# EAGLE board Qwiic_Alphanumeric_Display-Panel (EAGLE 9.6.2), part 1 of 3
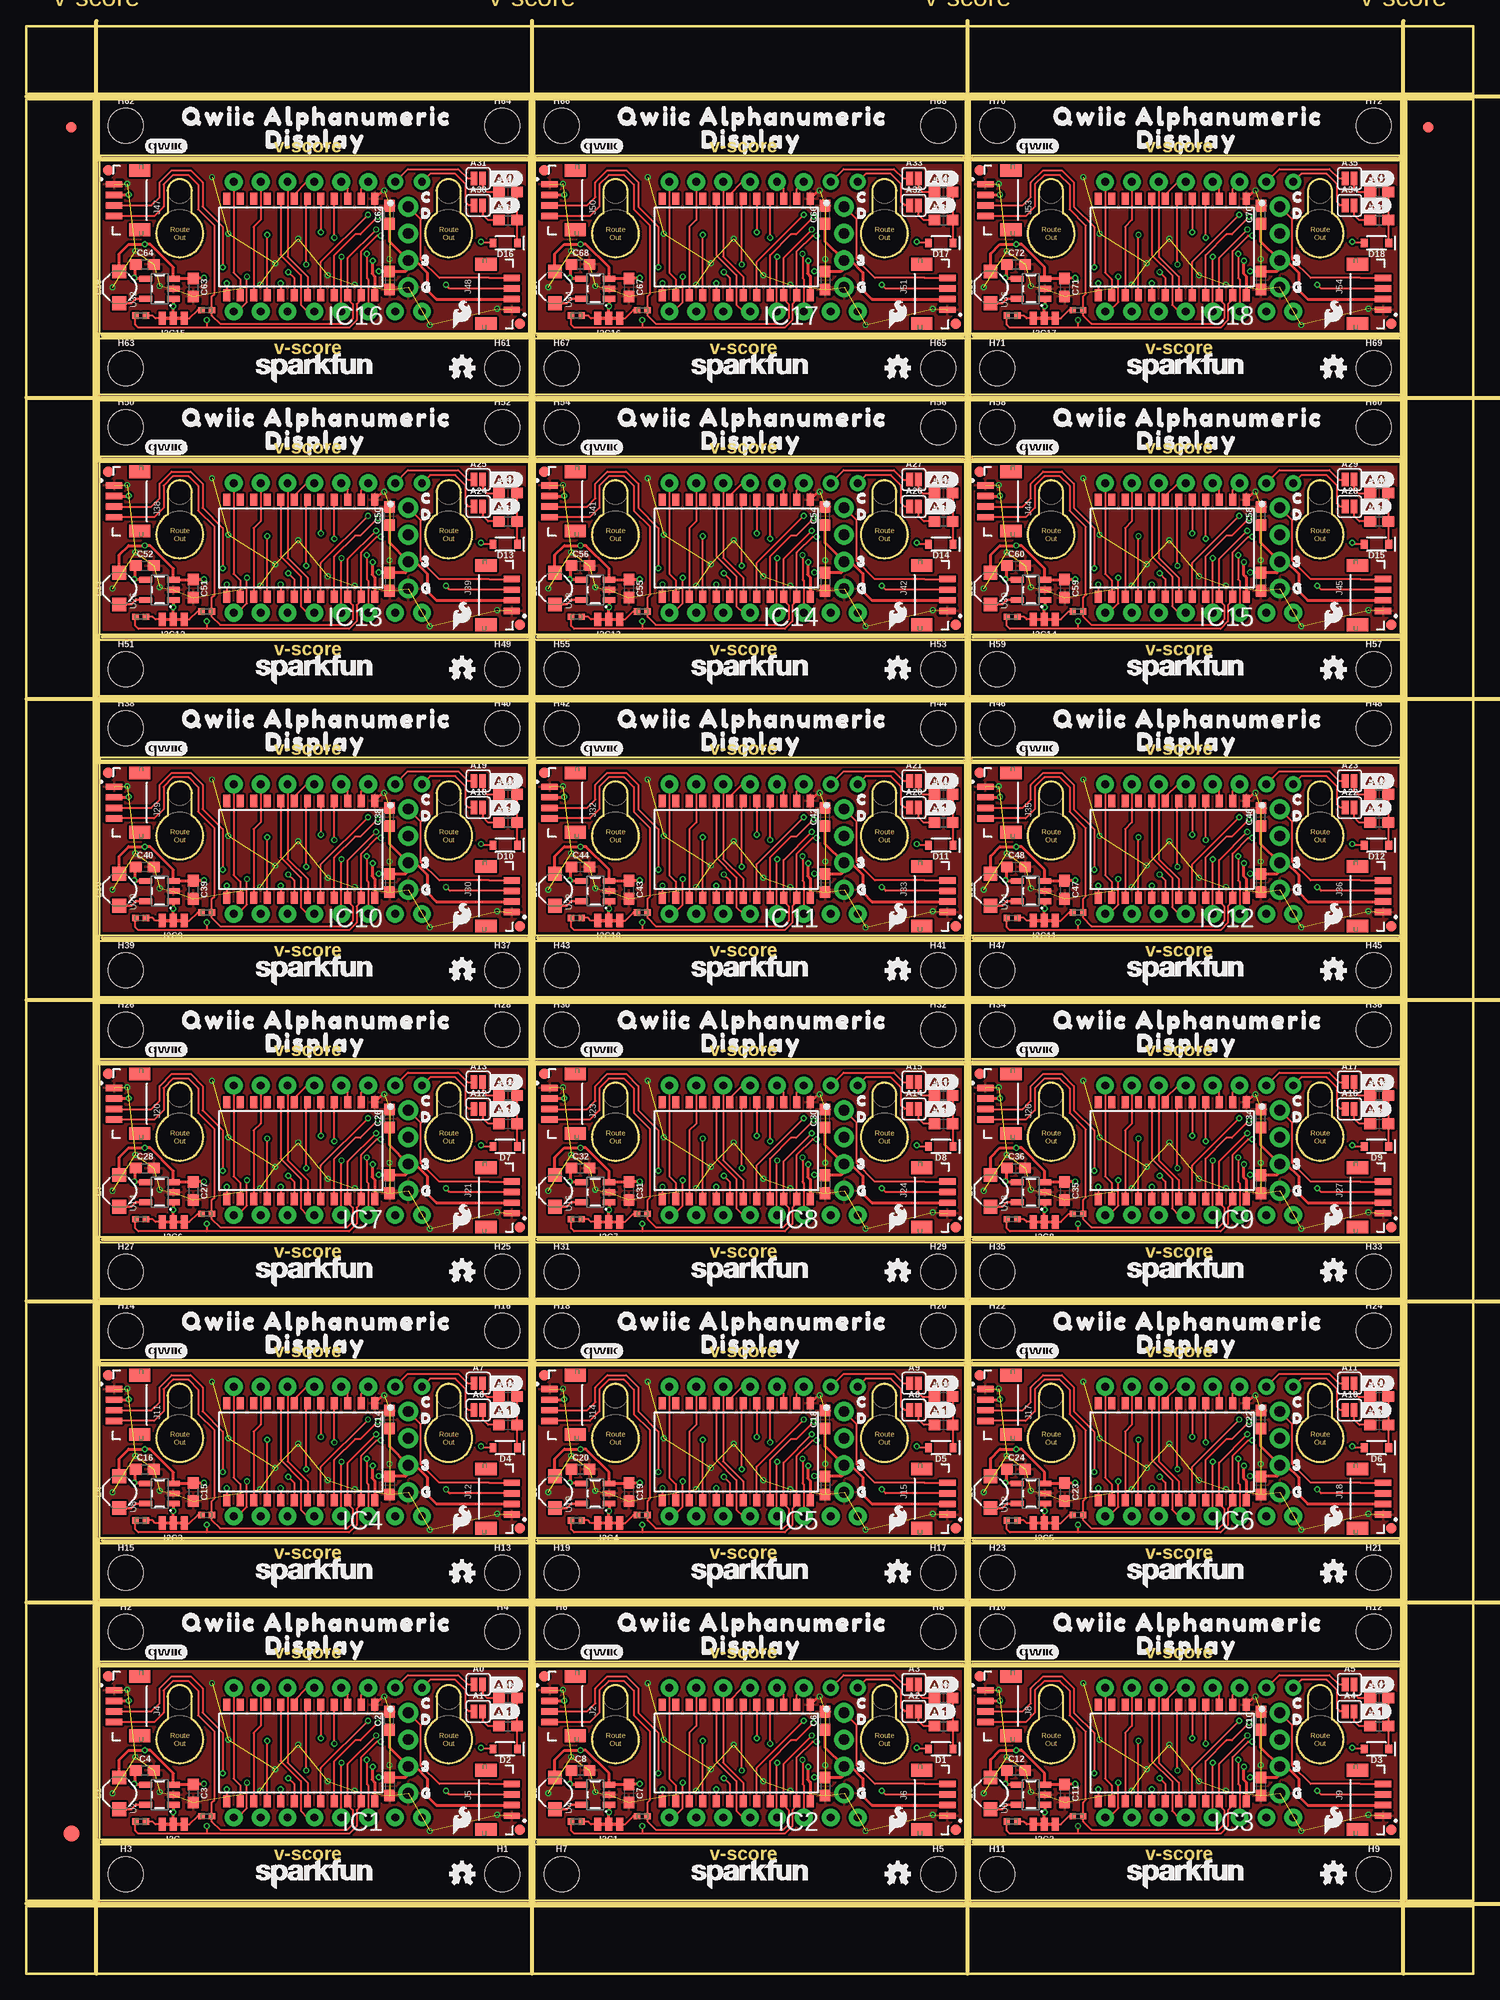
[diagram p0: board, top side]
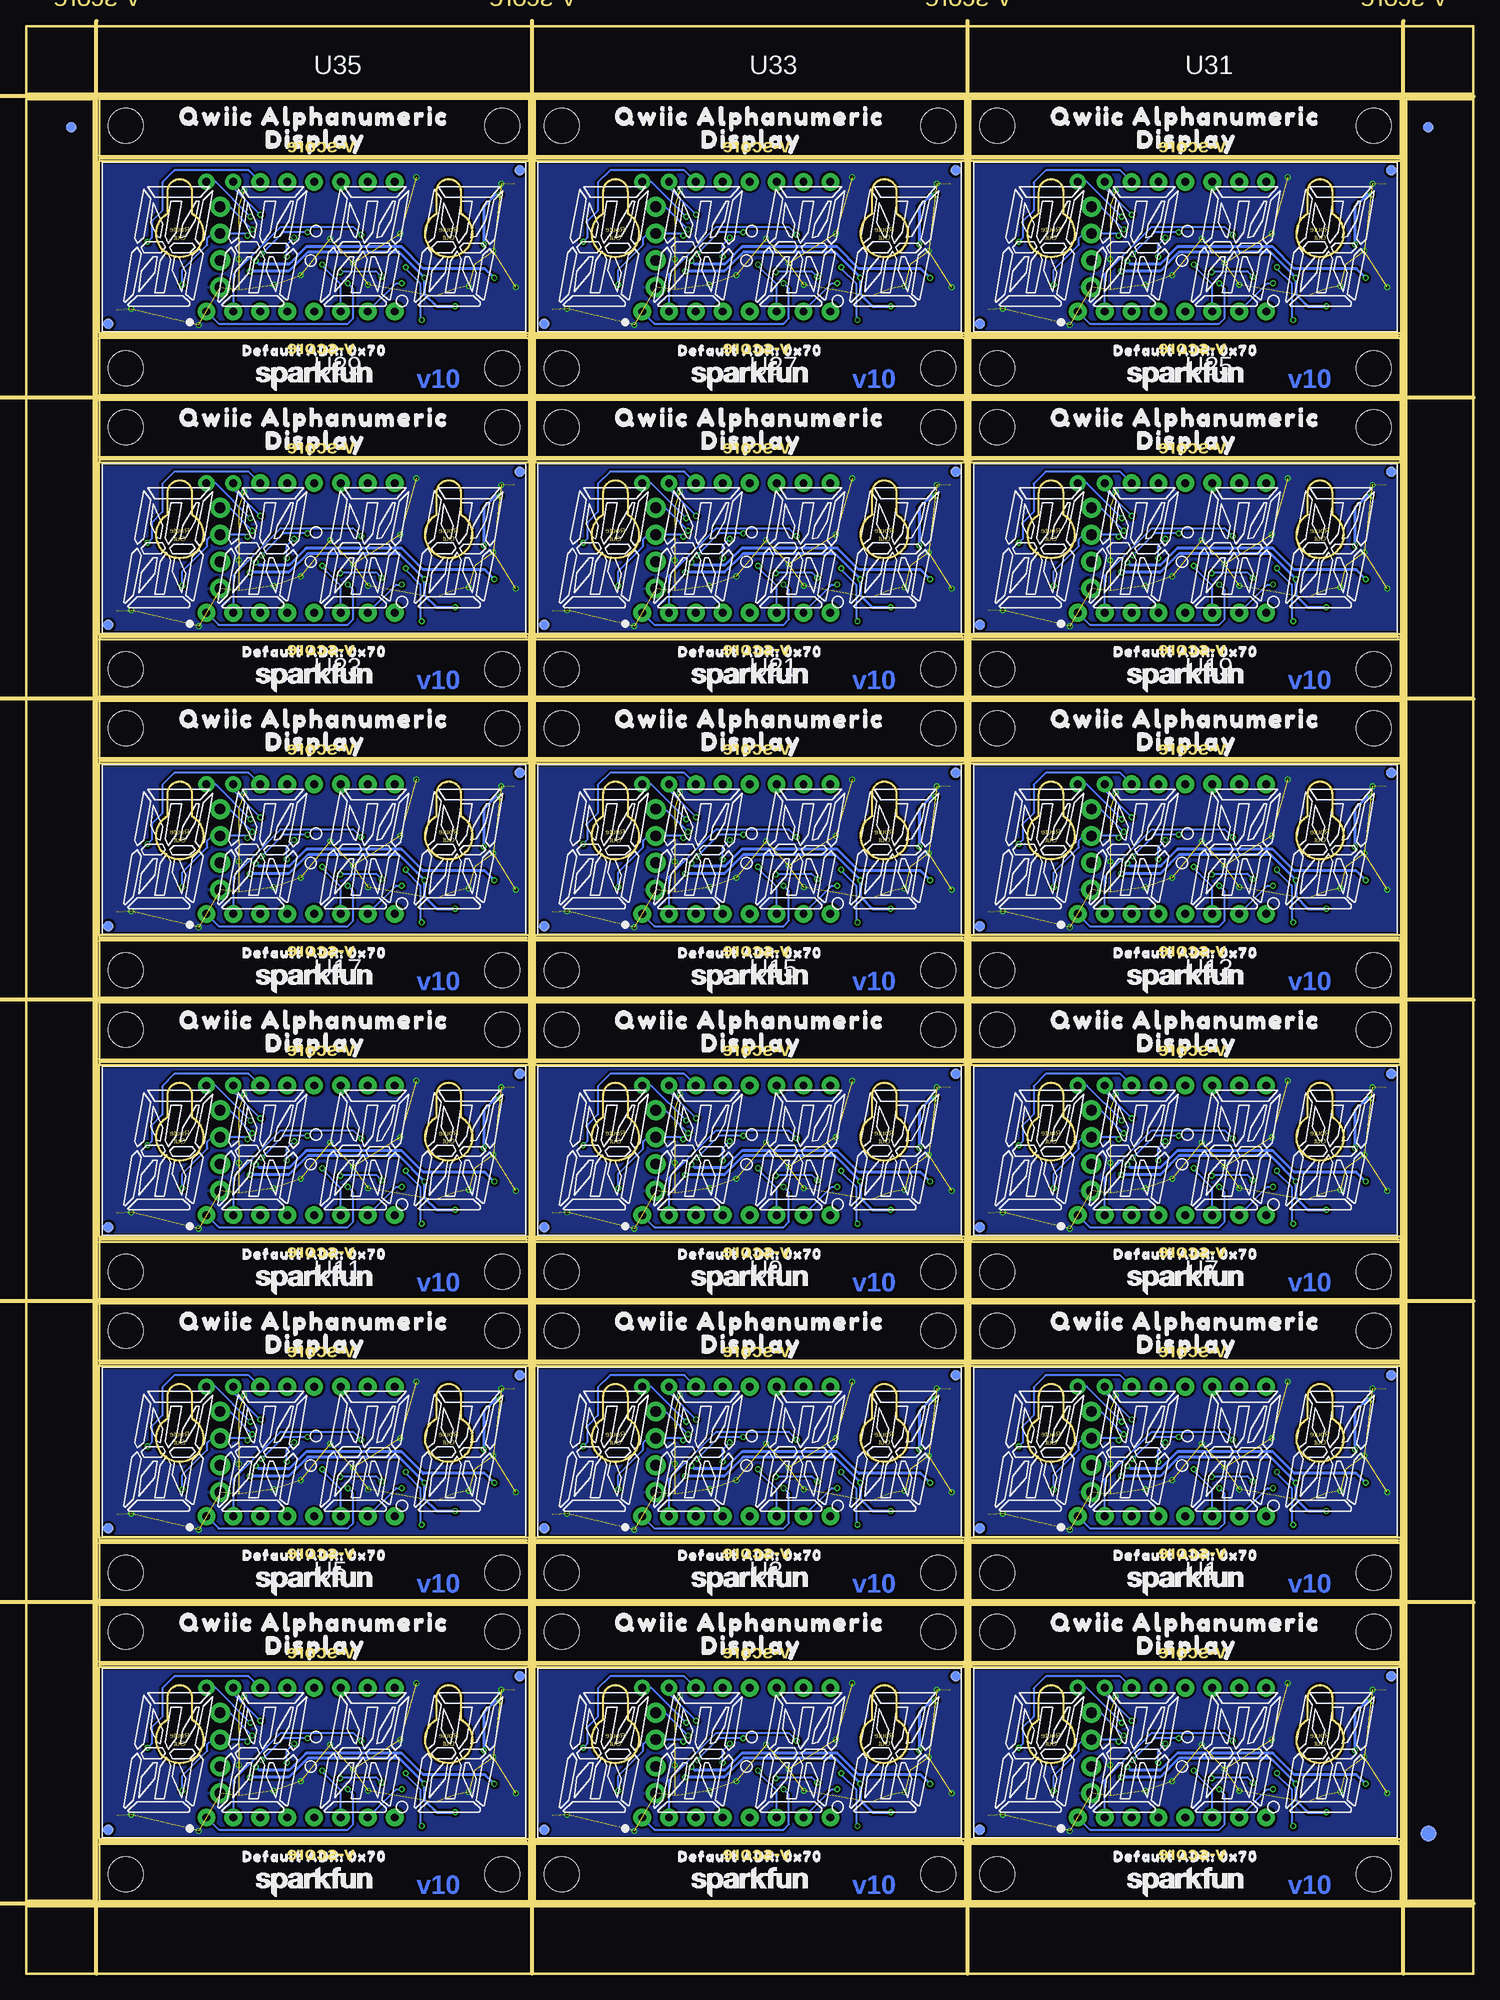
[diagram p1: board, bottom side, seen from below]

Size 136.65 x 183.9 mm. Coordinates in mm from the lower left corner, seen from the top.
Outline: 232 segments
Copper layers (1*16): Top 0.035mm / dielectric 1.5mm / Bottom 0.035mm
Design rules "Qwiic_Alphanumeric_Display": minimum track width 5mil, minimum drill 0.3mm, track to track 5mil, track to pad 5mil, pad to pad 5mil, via to via 5mil, smd to smd 5mil, copper to edge 7mil, drill to drill 7mil, minimum pad ring 5mil, minimum via ring 5mil, stop-mask expansion 2.5mil, vias tented up to drill 25mil, thermal gap 10mil
Milling: 47 lines

## Footprints (pad centres in the part's own frame; a part is rotated, then mirrored left to right if it is on the bottom)
SMT-JUMPER_2_NO_SILK = smd 0.635 x 1.27: 1 -0.406,0; 2 0.406,0
0603 = smd 1.1 x 1: 1 -0.85,0; 2 0.85,0
SOD-323 = smd 0.63 x 0.83: A 1.15,0; C -1.15,0
FIDUCIAL-1X2 = smd 1 x 1: 1 0,0
FIDUCIAL-1.5X3 = smd 1.5 x 1.5: 1 0,0
STAND-OFF = hole 3.302: 0,0
SMT-JUMPER_3_2-NC_TRACE_NO-SILK = smd 0.66 x 1.27: 1 -1.041,0; 2 0,0; 3 1.041,0
VK16K33 = smd 0.66 x 1.143: 1 -6.985,-4.572; 2 -5.715,-4.572; 3 -4.445,-4.572; 4 -3.175,-4.572; 5 -1.905,-4.572; 6 -0.635,-4.572; 7 0.635,-4.572; 8 1.905,-4.572; 9 3.175,-4.572; 10 4.445,-4.572; 11 5.715,-4.572; 12 6.985,-4.572; 13 6.985,4.572; 14 5.715,4.572; 15 4.445,4.572; 16 3.175,4.572; 17 1.905,4.572; 18 0.635,4.572; 19 -0.635,4.572; 20 -1.905,4.572; 21 -3.175,4.572; 22 -4.445,4.572; 23 -5.715,4.572; 24 -6.985,4.572
1X04_NO_SILK = drill 1.016 pad 1.88: 1 0,0; 2 2.54,0; 3 5.08,0; 4 7.62,0
JST04_1MM_VERT = smd 0.6 x 1.55: 1 -1.478,0.775; 2 -0.478,0.775; 3 0.522,0.775; 4 1.522,0.775 | smd 1.2 x 2: NC1 -2.778,3.2; NC2 2.822,3.2
INDUCTOR_4.7UH = smd 1.3 x 1.3: P$1 -1.5,0; P$2 1.5,0
0402-TIGHT = smd 0.6 x 0.6: 1 -0.5,0; 2 0.5,0
SILSMART_DISPLAY = drill 0.75 pad 1.676: 1 -10.178,-6.092; 2 -7.638,-6.092; 3 -5.098,-6.092; 4 -2.558,-6.092; 5 -0.018,-6.092; 6 2.522,-6.092; 7 5.062,-6.092; 8 7.602,-6.092; 9 7.602,6.148; 10 5.062,6.148; 11 2.522,6.148; 12 -0.018,6.148; 13 -2.558,6.148; 14 -5.098,6.148 | drill 0.75 pad 1.524: 15 -7.638,6.148; 16 -10.178,6.148
SOT23-5 = smd 0.55 x 1.2: 1 -0.95,-1.3; 2 0,-1.3; 3 0.95,-1.3; 4 0.95,1.3; 5 -0.95,1.3

## Placement (x,y rotation side)
A0  JUMPER-SMT_2_NO_SILK  [SMT-JUMPER_2_NO_SILK]  42.67,27.3 0 top
A1  JUMPER-SMT_2_NO_SILK  [SMT-JUMPER_2_NO_SILK]  42.67,24.77 0 top
A2  JUMPER-SMT_2_NO_SILK  [SMT-JUMPER_2_NO_SILK]  83.82,24.77 0 top
A3  JUMPER-SMT_2_NO_SILK  [SMT-JUMPER_2_NO_SILK]  83.82,27.3 0 top
A4  JUMPER-SMT_2_NO_SILK  [SMT-JUMPER_2_NO_SILK]  124.97,24.77 0 top
A5  JUMPER-SMT_2_NO_SILK  [SMT-JUMPER_2_NO_SILK]  124.97,27.3 0 top
A6  JUMPER-SMT_2_NO_SILK  [SMT-JUMPER_2_NO_SILK]  42.67,53.21 0 top
A7  JUMPER-SMT_2_NO_SILK  [SMT-JUMPER_2_NO_SILK]  42.67,55.75 0 top
A8  JUMPER-SMT_2_NO_SILK  [SMT-JUMPER_2_NO_SILK]  83.82,53.21 0 top
A9  JUMPER-SMT_2_NO_SILK  [SMT-JUMPER_2_NO_SILK]  83.82,55.75 0 top
A10  JUMPER-SMT_2_NO_SILK  [SMT-JUMPER_2_NO_SILK]  124.97,53.21 0 top
A11  JUMPER-SMT_2_NO_SILK  [SMT-JUMPER_2_NO_SILK]  124.97,55.75 0 top
A12  JUMPER-SMT_2_NO_SILK  [SMT-JUMPER_2_NO_SILK]  42.67,81.66 0 top
A13  JUMPER-SMT_2_NO_SILK  [SMT-JUMPER_2_NO_SILK]  42.67,84.2 0 top
A14  JUMPER-SMT_2_NO_SILK  [SMT-JUMPER_2_NO_SILK]  83.82,81.66 0 top
A15  JUMPER-SMT_2_NO_SILK  [SMT-JUMPER_2_NO_SILK]  83.82,84.2 0 top
A16  JUMPER-SMT_2_NO_SILK  [SMT-JUMPER_2_NO_SILK]  124.97,81.66 0 top
A17  JUMPER-SMT_2_NO_SILK  [SMT-JUMPER_2_NO_SILK]  124.97,84.2 0 top
A18  JUMPER-SMT_2_NO_SILK  [SMT-JUMPER_2_NO_SILK]  42.67,110.11 0 top
A19  JUMPER-SMT_2_NO_SILK  [SMT-JUMPER_2_NO_SILK]  42.67,112.65 0 top
A20  JUMPER-SMT_2_NO_SILK  [SMT-JUMPER_2_NO_SILK]  83.82,110.11 0 top
A21  JUMPER-SMT_2_NO_SILK  [SMT-JUMPER_2_NO_SILK]  83.82,112.65 0 top
A22  JUMPER-SMT_2_NO_SILK  [SMT-JUMPER_2_NO_SILK]  124.97,110.11 0 top
A23  JUMPER-SMT_2_NO_SILK  [SMT-JUMPER_2_NO_SILK]  124.97,112.65 0 top
A24  JUMPER-SMT_2_NO_SILK  [SMT-JUMPER_2_NO_SILK]  42.67,138.56 0 top
A25  JUMPER-SMT_2_NO_SILK  [SMT-JUMPER_2_NO_SILK]  42.67,141.1 0 top
A26  JUMPER-SMT_2_NO_SILK  [SMT-JUMPER_2_NO_SILK]  83.82,138.56 0 top
A27  JUMPER-SMT_2_NO_SILK  [SMT-JUMPER_2_NO_SILK]  83.82,141.1 0 top
A28  JUMPER-SMT_2_NO_SILK  [SMT-JUMPER_2_NO_SILK]  124.97,138.56 0 top
A29  JUMPER-SMT_2_NO_SILK  [SMT-JUMPER_2_NO_SILK]  124.97,141.1 0 top
A30  JUMPER-SMT_2_NO_SILK  [SMT-JUMPER_2_NO_SILK]  42.67,167 0 top
A31  JUMPER-SMT_2_NO_SILK  [SMT-JUMPER_2_NO_SILK]  42.67,169.55 0 top
A32  JUMPER-SMT_2_NO_SILK  [SMT-JUMPER_2_NO_SILK]  83.82,167 0 top
A33  JUMPER-SMT_2_NO_SILK  [SMT-JUMPER_2_NO_SILK]  83.82,169.55 0 top
A34  JUMPER-SMT_2_NO_SILK  [SMT-JUMPER_2_NO_SILK]  124.97,167 0 top
A35  JUMPER-SMT_2_NO_SILK  [SMT-JUMPER_2_NO_SILK]  124.97,169.55 0 top
C1  0.1uF  [0603]  34.29,17.65 270 top
C2  10uF  [0603]  34.29,23.88 90 top
C3  4.7uF  [0603]  15.75,17.02 270 top
C4  10uF  [0603]  11.18,19.18 0 top
C5  0.1uF  [0603]  75.44,17.65 270 top
C6  10uF  [0603]  75.44,23.88 90 top
C7  4.7uF  [0603]  56.9,17.02 270 top
C8  10uF  [0603]  52.32,19.18 0 top
C9  0.1uF  [0603]  116.59,17.65 270 top
C10  10uF  [0603]  116.59,23.88 90 top
C11  4.7uF  [0603]  98.04,17.02 270 top
C12  10uF  [0603]  93.47,19.18 0 top
C13  0.1uF  [0603]  34.29,46.1 270 top
C14  10uF  [0603]  34.29,52.32 90 top
C15  4.7uF  [0603]  15.75,45.47 270 top
C16  10uF  [0603]  11.18,47.62 0 top
C17  0.1uF  [0603]  75.44,46.1 270 top
C18  10uF  [0603]  75.44,52.32 90 top
C19  4.7uF  [0603]  56.9,45.47 270 top
C20  10uF  [0603]  52.32,47.62 0 top
C21  0.1uF  [0603]  116.59,46.1 270 top
C22  10uF  [0603]  116.59,52.32 90 top
C23  4.7uF  [0603]  98.04,45.47 270 top
C24  10uF  [0603]  93.47,47.62 0 top
C25  0.1uF  [0603]  34.29,74.55 270 top
C26  10uF  [0603]  34.29,80.77 90 top
C27  4.7uF  [0603]  15.75,73.91 270 top
C28  10uF  [0603]  11.18,76.07 0 top
C29  0.1uF  [0603]  75.44,74.55 270 top
C30  10uF  [0603]  75.44,80.77 90 top
C31  4.7uF  [0603]  56.9,73.91 270 top
C32  10uF  [0603]  52.32,76.07 0 top
C33  0.1uF  [0603]  116.59,74.55 270 top
C34  10uF  [0603]  116.59,80.77 90 top
C35  4.7uF  [0603]  98.04,73.91 270 top
C36  10uF  [0603]  93.47,76.07 0 top
C37  0.1uF  [0603]  34.29,103 270 top
C38  10uF  [0603]  34.29,109.22 90 top
C39  4.7uF  [0603]  15.75,102.36 270 top
C40  10uF  [0603]  11.18,104.52 0 top
C41  0.1uF  [0603]  75.44,103 270 top
C42  10uF  [0603]  75.44,109.22 90 top
C43  4.7uF  [0603]  56.9,102.36 270 top
C44  10uF  [0603]  52.32,104.52 0 top
C45  0.1uF  [0603]  116.59,103 270 top
C46  10uF  [0603]  116.59,109.22 90 top
C47  4.7uF  [0603]  98.04,102.36 270 top
C48  10uF  [0603]  93.47,104.52 0 top
C49  0.1uF  [0603]  34.29,131.44 270 top
C50  10uF  [0603]  34.29,137.67 90 top
C51  4.7uF  [0603]  15.75,130.81 270 top
C52  10uF  [0603]  11.18,132.97 0 top
C53  0.1uF  [0603]  75.44,131.44 270 top
C54  10uF  [0603]  75.44,137.67 90 top
C55  4.7uF  [0603]  56.9,130.81 270 top
C56  10uF  [0603]  52.32,132.97 0 top
C57  0.1uF  [0603]  116.59,131.44 270 top
C58  10uF  [0603]  116.59,137.67 90 top
C59  4.7uF  [0603]  98.04,130.81 270 top
C60  10uF  [0603]  93.47,132.97 0 top
C61  0.1uF  [0603]  34.29,159.89 270 top
C62  10uF  [0603]  34.29,166.12 90 top
C63  4.7uF  [0603]  15.75,159.26 270 top
C64  10uF  [0603]  11.18,161.42 0 top
C65  0.1uF  [0603]  75.44,159.89 270 top
C66  10uF  [0603]  75.44,166.12 90 top
C67  4.7uF  [0603]  56.9,159.26 270 top
C68  10uF  [0603]  52.32,161.42 0 top
C69  0.1uF  [0603]  116.59,159.89 270 top
C70  10uF  [0603]  116.59,166.12 90 top
C71  4.7uF  [0603]  98.04,159.26 270 top
C72  10uF  [0603]  93.47,161.42 0 top
D1  250mA/100V  [SOD-323]  86.36,21.21 180 top
D2  250mA/100V  [SOD-323]  45.21,21.21 180 top
D3  250mA/100V  [SOD-323]  127.51,21.21 180 top
D4  250mA/100V  [SOD-323]  45.21,49.66 180 top
D5  250mA/100V  [SOD-323]  86.36,49.66 180 top
D6  250mA/100V  [SOD-323]  127.51,49.66 180 top
D7  250mA/100V  [SOD-323]  45.21,78.11 180 top
D8  250mA/100V  [SOD-323]  86.36,78.11 180 top
D9  250mA/100V  [SOD-323]  127.51,78.11 180 top
D10  250mA/100V  [SOD-323]  45.21,106.55 180 top
D11  250mA/100V  [SOD-323]  86.36,106.55 180 top
D12  250mA/100V  [SOD-323]  127.51,106.55 180 top
D13  250mA/100V  [SOD-323]  45.21,135 180 top
D14  250mA/100V  [SOD-323]  86.36,135 180 top
D15  250mA/100V  [SOD-323]  127.51,135 180 top
D16  250mA/100V  [SOD-323]  45.21,163.45 180 top
D17  250mA/100V  [SOD-323]  86.36,163.45 180 top
D18  250mA/100V  [SOD-323]  127.51,163.45 180 top
E$1  [FIDUCIAL-1X2]  4.23,174.37 0 top
E$2  [FIDUCIAL-1X2]  4.23,174.37 0 bottom
E$3  [FIDUCIAL-1X2]  132.42,174.37 0 top
E$4  [FIDUCIAL-1X2]  132.42,174.37 0 bottom
E$5  [FIDUCIAL-1.5X3]  4.23,13.21 0 top
E$6  [FIDUCIAL-1.5X3]  4.23,13.21 0 bottom
FD1  FIDUCIAL1X2  [FIDUCIAL-1X2]  7.75,28.07 0 top
FD2  FIDUCIAL1X2  [FIDUCIAL-1X2]  7.75,28.07 0 bottom
FD3  FIDUCIAL1X2  [FIDUCIAL-1X2]  46.61,13.59 0 top
FD4  FIDUCIAL1X2  [FIDUCIAL-1X2]  46.61,13.59 0 bottom
FD5  FIDUCIAL1X2  [FIDUCIAL-1X2]  48.89,28.07 0 top
FD6  FIDUCIAL1X2  [FIDUCIAL-1X2]  48.89,28.07 0 bottom
FD7  FIDUCIAL1X2  [FIDUCIAL-1X2]  87.76,13.59 0 top
FD8  FIDUCIAL1X2  [FIDUCIAL-1X2]  87.76,13.59 0 bottom
FD9  FIDUCIAL1X2  [FIDUCIAL-1X2]  90.04,28.07 0 top
FD10  FIDUCIAL1X2  [FIDUCIAL-1X2]  90.04,28.07 0 bottom
FD11  FIDUCIAL1X2  [FIDUCIAL-1X2]  128.91,13.59 0 top
FD12  FIDUCIAL1X2  [FIDUCIAL-1X2]  128.91,13.59 0 bottom
FD13  FIDUCIAL1X2  [FIDUCIAL-1X2]  7.75,56.51 0 top
FD14  FIDUCIAL1X2  [FIDUCIAL-1X2]  7.75,56.51 0 bottom
FD15  FIDUCIAL1X2  [FIDUCIAL-1X2]  46.61,42.04 0 top
FD16  FIDUCIAL1X2  [FIDUCIAL-1X2]  46.61,42.04 0 bottom
FD17  FIDUCIAL1X2  [FIDUCIAL-1X2]  48.89,56.51 0 top
FD18  FIDUCIAL1X2  [FIDUCIAL-1X2]  48.89,56.51 0 bottom
FD19  FIDUCIAL1X2  [FIDUCIAL-1X2]  87.76,42.04 0 top
FD20  FIDUCIAL1X2  [FIDUCIAL-1X2]  87.76,42.04 0 bottom
FD21  FIDUCIAL1X2  [FIDUCIAL-1X2]  90.04,56.51 0 top
FD22  FIDUCIAL1X2  [FIDUCIAL-1X2]  90.04,56.51 0 bottom
FD23  FIDUCIAL1X2  [FIDUCIAL-1X2]  128.91,42.04 0 top
FD24  FIDUCIAL1X2  [FIDUCIAL-1X2]  128.91,42.04 0 bottom
FD25  FIDUCIAL1X2  [FIDUCIAL-1X2]  7.75,84.96 0 top
FD26  FIDUCIAL1X2  [FIDUCIAL-1X2]  7.75,84.96 0 bottom
FD27  FIDUCIAL1X2  [FIDUCIAL-1X2]  46.61,70.48 0 top
FD28  FIDUCIAL1X2  [FIDUCIAL-1X2]  46.61,70.48 0 bottom
FD29  FIDUCIAL1X2  [FIDUCIAL-1X2]  48.89,84.96 0 top
FD30  FIDUCIAL1X2  [FIDUCIAL-1X2]  48.89,84.96 0 bottom
FD31  FIDUCIAL1X2  [FIDUCIAL-1X2]  87.76,70.48 0 top
FD32  FIDUCIAL1X2  [FIDUCIAL-1X2]  87.76,70.48 0 bottom
FD33  FIDUCIAL1X2  [FIDUCIAL-1X2]  90.04,84.96 0 top
FD34  FIDUCIAL1X2  [FIDUCIAL-1X2]  90.04,84.96 0 bottom
FD35  FIDUCIAL1X2  [FIDUCIAL-1X2]  128.91,70.48 0 top
FD36  FIDUCIAL1X2  [FIDUCIAL-1X2]  128.91,70.48 0 bottom
FD37  FIDUCIAL1X2  [FIDUCIAL-1X2]  7.75,113.41 0 top
FD38  FIDUCIAL1X2  [FIDUCIAL-1X2]  7.75,113.41 0 bottom
FD39  FIDUCIAL1X2  [FIDUCIAL-1X2]  46.61,98.93 0 top
FD40  FIDUCIAL1X2  [FIDUCIAL-1X2]  46.61,98.93 0 bottom
FD41  FIDUCIAL1X2  [FIDUCIAL-1X2]  48.89,113.41 0 top
FD42  FIDUCIAL1X2  [FIDUCIAL-1X2]  48.89,113.41 0 bottom
FD43  FIDUCIAL1X2  [FIDUCIAL-1X2]  87.76,98.93 0 top
FD44  FIDUCIAL1X2  [FIDUCIAL-1X2]  87.76,98.93 0 bottom
FD45  FIDUCIAL1X2  [FIDUCIAL-1X2]  90.04,113.41 0 top
FD46  FIDUCIAL1X2  [FIDUCIAL-1X2]  90.04,113.41 0 bottom
FD47  FIDUCIAL1X2  [FIDUCIAL-1X2]  128.91,98.93 0 top
FD48  FIDUCIAL1X2  [FIDUCIAL-1X2]  128.91,98.93 0 bottom
FD49  FIDUCIAL1X2  [FIDUCIAL-1X2]  7.75,141.86 0 top
FD50  FIDUCIAL1X2  [FIDUCIAL-1X2]  7.75,141.86 0 bottom
FD51  FIDUCIAL1X2  [FIDUCIAL-1X2]  46.61,127.38 0 top
FD52  FIDUCIAL1X2  [FIDUCIAL-1X2]  46.61,127.38 0 bottom
FD53  FIDUCIAL1X2  [FIDUCIAL-1X2]  48.89,141.86 0 top
FD54  FIDUCIAL1X2  [FIDUCIAL-1X2]  48.89,141.86 0 bottom
FD55  FIDUCIAL1X2  [FIDUCIAL-1X2]  87.76,127.38 0 top
FD56  FIDUCIAL1X2  [FIDUCIAL-1X2]  87.76,127.38 0 bottom
FD57  FIDUCIAL1X2  [FIDUCIAL-1X2]  90.04,141.86 0 top
FD58  FIDUCIAL1X2  [FIDUCIAL-1X2]  90.04,141.86 0 bottom
FD59  FIDUCIAL1X2  [FIDUCIAL-1X2]  128.91,127.38 0 top
FD60  FIDUCIAL1X2  [FIDUCIAL-1X2]  128.91,127.38 0 bottom
FD61  FIDUCIAL1X2  [FIDUCIAL-1X2]  7.75,170.31 0 top
FD62  FIDUCIAL1X2  [FIDUCIAL-1X2]  7.75,170.31 0 bottom
FD63  FIDUCIAL1X2  [FIDUCIAL-1X2]  46.61,155.83 0 top
FD64  FIDUCIAL1X2  [FIDUCIAL-1X2]  46.61,155.83 0 bottom
FD65  FIDUCIAL1X2  [FIDUCIAL-1X2]  48.89,170.31 0 top
FD66  FIDUCIAL1X2  [FIDUCIAL-1X2]  48.89,170.31 0 bottom
FD67  FIDUCIAL1X2  [FIDUCIAL-1X2]  87.76,155.83 0 top
FD68  FIDUCIAL1X2  [FIDUCIAL-1X2]  87.76,155.83 0 bottom
FD69  FIDUCIAL1X2  [FIDUCIAL-1X2]  90.04,170.31 0 top
FD70  FIDUCIAL1X2  [FIDUCIAL-1X2]  90.04,170.31 0 bottom
FD71  FIDUCIAL1X2  [FIDUCIAL-1X2]  128.91,155.83 0 top
FD72  FIDUCIAL1X2  [FIDUCIAL-1X2]  128.91,155.83 0 bottom
H1  STAND-OFF  [STAND-OFF]  44.96,9.4 0 top
H2  STAND-OFF  [STAND-OFF]  9.4,32.26 0 top
H3  STAND-OFF  [STAND-OFF]  9.4,9.4 0 top
H4  STAND-OFF  [STAND-OFF]  44.96,32.26 0 top
H5  STAND-OFF  [STAND-OFF]  86.11,9.4 0 top
H6  STAND-OFF  [STAND-OFF]  50.55,32.26 0 top
H7  STAND-OFF  [STAND-OFF]  50.55,9.4 0 top
H8  STAND-OFF  [STAND-OFF]  86.11,32.26 0 top
H9  STAND-OFF  [STAND-OFF]  127.25,9.4 0 top
H10  STAND-OFF  [STAND-OFF]  91.69,32.26 0 top
H11  STAND-OFF  [STAND-OFF]  91.69,9.4 0 top
H12  STAND-OFF  [STAND-OFF]  127.25,32.26 0 top
H13  STAND-OFF  [STAND-OFF]  44.96,37.85 0 top
H14  STAND-OFF  [STAND-OFF]  9.4,60.71 0 top
H15  STAND-OFF  [STAND-OFF]  9.4,37.85 0 top
H16  STAND-OFF  [STAND-OFF]  44.96,60.71 0 top
H17  STAND-OFF  [STAND-OFF]  86.11,37.85 0 top
H18  STAND-OFF  [STAND-OFF]  50.55,60.71 0 top
H19  STAND-OFF  [STAND-OFF]  50.55,37.85 0 top
H20  STAND-OFF  [STAND-OFF]  86.11,60.71 0 top
H21  STAND-OFF  [STAND-OFF]  127.25,37.85 0 top
H22  STAND-OFF  [STAND-OFF]  91.69,60.71 0 top
H23  STAND-OFF  [STAND-OFF]  91.69,37.85 0 top
H24  STAND-OFF  [STAND-OFF]  127.25,60.71 0 top
H25  STAND-OFF  [STAND-OFF]  44.96,66.29 0 top
H26  STAND-OFF  [STAND-OFF]  9.4,89.15 0 top
H27  STAND-OFF  [STAND-OFF]  9.4,66.29 0 top
H28  STAND-OFF  [STAND-OFF]  44.96,89.15 0 top
H29  STAND-OFF  [STAND-OFF]  86.11,66.29 0 top
H30  STAND-OFF  [STAND-OFF]  50.55,89.15 0 top
H31  STAND-OFF  [STAND-OFF]  50.55,66.29 0 top
H32  STAND-OFF  [STAND-OFF]  86.11,89.15 0 top
H33  STAND-OFF  [STAND-OFF]  127.25,66.29 0 top
H34  STAND-OFF  [STAND-OFF]  91.69,89.15 0 top
H35  STAND-OFF  [STAND-OFF]  91.69,66.29 0 top
H36  STAND-OFF  [STAND-OFF]  127.25,89.15 0 top
H37  STAND-OFF  [STAND-OFF]  44.96,94.74 0 top
H38  STAND-OFF  [STAND-OFF]  9.4,117.6 0 top
H39  STAND-OFF  [STAND-OFF]  9.4,94.74 0 top
H40  STAND-OFF  [STAND-OFF]  44.96,117.6 0 top
H41  STAND-OFF  [STAND-OFF]  86.11,94.74 0 top
H42  STAND-OFF  [STAND-OFF]  50.55,117.6 0 top
H43  STAND-OFF  [STAND-OFF]  50.55,94.74 0 top
H44  STAND-OFF  [STAND-OFF]  86.11,117.6 0 top
H45  STAND-OFF  [STAND-OFF]  127.25,94.74 0 top
H46  STAND-OFF  [STAND-OFF]  91.69,117.6 0 top
H47  STAND-OFF  [STAND-OFF]  91.69,94.74 0 top
H48  STAND-OFF  [STAND-OFF]  127.25,117.6 0 top
H49  STAND-OFF  [STAND-OFF]  44.96,123.19 0 top
H50  STAND-OFF  [STAND-OFF]  9.4,146.05 0 top
H51  STAND-OFF  [STAND-OFF]  9.4,123.19 0 top
H52  STAND-OFF  [STAND-OFF]  44.96,146.05 0 top
H53  STAND-OFF  [STAND-OFF]  86.11,123.19 0 top
H54  STAND-OFF  [STAND-OFF]  50.55,146.05 0 top
H55  STAND-OFF  [STAND-OFF]  50.55,123.19 0 top
H56  STAND-OFF  [STAND-OFF]  86.11,146.05 0 top
H57  STAND-OFF  [STAND-OFF]  127.25,123.19 0 top
H58  STAND-OFF  [STAND-OFF]  91.69,146.05 0 top
H59  STAND-OFF  [STAND-OFF]  91.69,123.19 0 top
H60  STAND-OFF  [STAND-OFF]  127.25,146.05 0 top
H61  STAND-OFF  [STAND-OFF]  44.96,151.64 0 top
H62  STAND-OFF  [STAND-OFF]  9.4,174.5 0 top
H63  STAND-OFF  [STAND-OFF]  9.4,151.64 0 top
H64  STAND-OFF  [STAND-OFF]  44.96,174.5 0 top
H65  STAND-OFF  [STAND-OFF]  86.11,151.64 0 top
H66  STAND-OFF  [STAND-OFF]  50.55,174.5 0 top
H67  STAND-OFF  [STAND-OFF]  50.55,151.64 0 top
H68  STAND-OFF  [STAND-OFF]  86.11,174.5 0 top
H69  STAND-OFF  [STAND-OFF]  127.25,151.64 0 top
H70  STAND-OFF  [STAND-OFF]  91.69,174.5 0 top
H71  STAND-OFF  [STAND-OFF]  91.69,151.64 0 top
H72  STAND-OFF  [STAND-OFF]  127.25,174.5 0 top
I2C  JUMPER-SMT_3_2-NC_TRACE_NO-SILK  [SMT-JUMPER_3_2-NC_TRACE_NO-SILK]  13.84,14.1 180 top
I2C1  JUMPER-SMT_3_2-NC_TRACE_NO-SILK  [SMT-JUMPER_3_2-NC_TRACE_NO-SILK]  54.99,14.1 180 top
I2C2  JUMPER-SMT_3_2-NC_TRACE_NO-SILK  [SMT-JUMPER_3_2-NC_TRACE_NO-SILK]  96.14,14.1 180 top
I2C3  JUMPER-SMT_3_2-NC_TRACE_NO-SILK  [SMT-JUMPER_3_2-NC_TRACE_NO-SILK]  13.84,42.54 180 top
I2C4  JUMPER-SMT_3_2-NC_TRACE_NO-SILK  [SMT-JUMPER_3_2-NC_TRACE_NO-SILK]  54.99,42.54 180 top
I2C5  JUMPER-SMT_3_2-NC_TRACE_NO-SILK  [SMT-JUMPER_3_2-NC_TRACE_NO-SILK]  96.14,42.54 180 top
I2C6  JUMPER-SMT_3_2-NC_TRACE_NO-SILK  [SMT-JUMPER_3_2-NC_TRACE_NO-SILK]  13.84,70.99 180 top
I2C7  JUMPER-SMT_3_2-NC_TRACE_NO-SILK  [SMT-JUMPER_3_2-NC_TRACE_NO-SILK]  54.99,70.99 180 top
I2C8  JUMPER-SMT_3_2-NC_TRACE_NO-SILK  [SMT-JUMPER_3_2-NC_TRACE_NO-SILK]  96.14,70.99 180 top
I2C9  JUMPER-SMT_3_2-NC_TRACE_NO-SILK  [SMT-JUMPER_3_2-NC_TRACE_NO-SILK]  13.84,99.44 180 top
I2C10  JUMPER-SMT_3_2-NC_TRACE_NO-SILK  [SMT-JUMPER_3_2-NC_TRACE_NO-SILK]  54.99,99.44 180 top
I2C11  JUMPER-SMT_3_2-NC_TRACE_NO-SILK  [SMT-JUMPER_3_2-NC_TRACE_NO-SILK]  96.14,99.44 180 top
I2C12  JUMPER-SMT_3_2-NC_TRACE_NO-SILK  [SMT-JUMPER_3_2-NC_TRACE_NO-SILK]  13.84,127.89 180 top
I2C13  JUMPER-SMT_3_2-NC_TRACE_NO-SILK  [SMT-JUMPER_3_2-NC_TRACE_NO-SILK]  54.99,127.89 180 top
I2C14  JUMPER-SMT_3_2-NC_TRACE_NO-SILK  [SMT-JUMPER_3_2-NC_TRACE_NO-SILK]  96.14,127.89 180 top
I2C15  JUMPER-SMT_3_2-NC_TRACE_NO-SILK  [SMT-JUMPER_3_2-NC_TRACE_NO-SILK]  13.84,156.34 180 top
I2C16  JUMPER-SMT_3_2-NC_TRACE_NO-SILK  [SMT-JUMPER_3_2-NC_TRACE_NO-SILK]  54.99,156.34 180 top
I2C17  JUMPER-SMT_3_2-NC_TRACE_NO-SILK  [SMT-JUMPER_3_2-NC_TRACE_NO-SILK]  96.14,156.34 180 top
IC1  [VK16K33]  25.91,20.83 180 top
IC2  [VK16K33]  67.06,20.83 180 top
IC3  [VK16K33]  108.2,20.83 180 top
IC4  [VK16K33]  25.91,49.28 180 top
IC5  [VK16K33]  67.06,49.28 180 top
IC6  [VK16K33]  108.2,49.28 180 top
IC7  [VK16K33]  25.91,77.72 180 top
IC8  [VK16K33]  67.06,77.72 180 top
IC9  [VK16K33]  108.2,77.72 180 top
IC10  [VK16K33]  25.91,106.17 180 top
IC11  [VK16K33]  67.06,106.17 180 top
IC12  [VK16K33]  108.2,106.17 180 top
IC13  [VK16K33]  25.91,134.62 180 top
IC14  [VK16K33]  67.06,134.62 180 top
IC15  [VK16K33]  108.2,134.62 180 top
IC16  [VK16K33]  25.91,163.07 180 top
IC17  [VK16K33]  67.06,163.07 180 top
IC18  [VK16K33]  108.2,163.07 180 top
J1  [1X04_NO_SILK]  77.22,17.02 90 top
J2  Vertical Qwiic Connector  [JST04_1MM_VERT]  48.64,25.27 270 top
J3  [1X04_NO_SILK]  36.07,17.02 90 top
J4  Vertical Qwiic Connector  [JST04_1MM_VERT]  7.49,25.27 270 top
J5  Vertical Qwiic Connector  [JST04_1MM_VERT]  46.61,16.38 90 top
J6  Vertical Qwiic Connector  [JST04_1MM_VERT]  87.76,16.38 90 top
J7  [1X04_NO_SILK]  118.36,17.02 90 top
J8  Vertical Qwiic Connector  [JST04_1MM_VERT]  89.79,25.27 270 top
J9  Vertical Qwiic Connector  [JST04_1MM_VERT]  128.91,16.38 90 top
J10  [1X04_NO_SILK]  36.07,45.47 90 top
J11  Vertical Qwiic Connector  [JST04_1MM_VERT]  7.49,53.72 270 top
J12  Vertical Qwiic Connector  [JST04_1MM_VERT]  46.61,44.83 90 top
J13  [1X04_NO_SILK]  77.22,45.47 90 top
J14  Vertical Qwiic Connector  [JST04_1MM_VERT]  48.64,53.72 270 top
J15  Vertical Qwiic Connector  [JST04_1MM_VERT]  87.76,44.83 90 top
J16  [1X04_NO_SILK]  118.36,45.47 90 top
J17  Vertical Qwiic Connector  [JST04_1MM_VERT]  89.79,53.72 270 top
J18  Vertical Qwiic Connector  [JST04_1MM_VERT]  128.91,44.83 90 top
J19  [1X04_NO_SILK]  36.07,73.91 90 top
J20  Vertical Qwiic Connector  [JST04_1MM_VERT]  7.49,82.17 270 top
J21  Vertical Qwiic Connector  [JST04_1MM_VERT]  46.61,73.28 90 top
J22  [1X04_NO_SILK]  77.22,73.91 90 top
J23  Vertical Qwiic Connector  [JST04_1MM_VERT]  48.64,82.17 270 top
J24  Vertical Qwiic Connector  [JST04_1MM_VERT]  87.76,73.28 90 top
J25  [1X04_NO_SILK]  118.36,73.91 90 top
J26  Vertical Qwiic Connector  [JST04_1MM_VERT]  89.79,82.17 270 top
J27  Vertical Qwiic Connector  [JST04_1MM_VERT]  128.91,73.28 90 top
J28  [1X04_NO_SILK]  36.07,102.36 90 top
J29  Vertical Qwiic Connector  [JST04_1MM_VERT]  7.49,110.62 270 top
J30  Vertical Qwiic Connector  [JST04_1MM_VERT]  46.61,101.73 90 top
J31  [1X04_NO_SILK]  77.22,102.36 90 top
J32  Vertical Qwiic Connector  [JST04_1MM_VERT]  48.64,110.62 270 top
J33  Vertical Qwiic Connector  [JST04_1MM_VERT]  87.76,101.73 90 top
J34  [1X04_NO_SILK]  118.36,102.36 90 top
J35  Vertical Qwiic Connector  [JST04_1MM_VERT]  89.79,110.62 270 top
J36  Vertical Qwiic Connector  [JST04_1MM_VERT]  128.91,101.73 90 top
J37  [1X04_NO_SILK]  36.07,130.81 90 top
J38  Vertical Qwiic Connector  [JST04_1MM_VERT]  7.49,139.06 270 top
J39  Vertical Qwiic Connector  [JST04_1MM_VERT]  46.61,130.17 90 top
J40  [1X04_NO_SILK]  77.22,130.81 90 top
J41  Vertical Qwiic Connector  [JST04_1MM_VERT]  48.64,139.06 270 top
J42  Vertical Qwiic Connector  [JST04_1MM_VERT]  87.76,130.17 90 top
J43  [1X04_NO_SILK]  118.36,130.81 90 top
J44  Vertical Qwiic Connector  [JST04_1MM_VERT]  89.79,139.06 270 top
J45  Vertical Qwiic Connector  [JST04_1MM_VERT]  128.91,130.17 90 top
J46  [1X04_NO_SILK]  36.07,159.26 90 top
J47  Vertical Qwiic Connector  [JST04_1MM_VERT]  7.49,167.51 270 top
J48  Vertical Qwiic Connector  [JST04_1MM_VERT]  46.61,158.62 90 top
J49  [1X04_NO_SILK]  77.22,159.26 90 top
J50  Vertical Qwiic Connector  [JST04_1MM_VERT]  48.64,167.51 270 top
J51  Vertical Qwiic Connector  [JST04_1MM_VERT]  87.76,158.62 90 top
J52  [1X04_NO_SILK]  118.36,159.26 90 top
J53  Vertical Qwiic Connector  [JST04_1MM_VERT]  89.79,167.51 270 top
J54  Vertical Qwiic Connector  [JST04_1MM_VERT]  128.91,158.62 90 top
L1  4.7µH  [INDUCTOR_4.7UH]  8.76,17.02 90 top
L2  4.7µH  [INDUCTOR_4.7UH]  49.91,17.02 90 top
L3  4.7µH  [INDUCTOR_4.7UH]  91.06,17.02 90 top
L4  4.7µH  [INDUCTOR_4.7UH]  8.76,45.47 90 top
L5  4.7µH  [INDUCTOR_4.7UH]  49.91,45.47 90 top
L6  4.7µH  [INDUCTOR_4.7UH]  91.06,45.47 90 top
L7  4.7µH  [INDUCTOR_4.7UH]  8.76,73.91 90 top
L8  4.7µH  [INDUCTOR_4.7UH]  49.91,73.91 90 top
L9  4.7µH  [INDUCTOR_4.7UH]  91.06,73.91 90 top
L10  4.7µH  [INDUCTOR_4.7UH]  8.76,102.36 90 top
L11  4.7µH  [INDUCTOR_4.7UH]  49.91,102.36 90 top
L12  4.7µH  [INDUCTOR_4.7UH]  91.06,102.36 90 top
L13  4.7µH  [INDUCTOR_4.7UH]  8.76,130.81 90 top
L14  4.7µH  [INDUCTOR_4.7UH]  49.91,130.81 90 top
L15  4.7µH  [INDUCTOR_4.7UH]  91.06,130.81 90 top
L16  4.7µH  [INDUCTOR_4.7UH]  8.76,159.26 90 top
L17  4.7µH  [INDUCTOR_4.7UH]  49.91,159.26 90 top
L18  4.7µH  [INDUCTOR_4.7UH]  91.06,159.26 90 top
LOGO1  OSHW-LOGOMINI  [OSHW-LOGO-MINI]  41.15,9.4 0 top
LOGO2  SFE_LOGO_NAME.1_INCH  [SFE_LOGO_NAME_.1]  27.18,8.64 0 bottom
LOGO3  SFE_LOGO_NAME.1_INCH  [SFE_LOGO_NAME_.1]  27.18,9.4 0 top
LOGO4  SFE_LOGO_FLAME.1_INCH  [SFE_LOGO_FLAME_.1]  41.15,14.48 0 top
LOGO5  OSHW-LOGOMINI  [OSHW-LOGO-MINI]  82.3,9.4 0 top
LOGO6  SFE_LOGO_NAME.1_INCH  [SFE_LOGO_NAME_.1]  68.33,8.64 0 bottom
LOGO7  SFE_LOGO_NAME.1_INCH  [SFE_LOGO_NAME_.1]  68.33,9.4 0 top
LOGO8  SFE_LOGO_FLAME.1_INCH  [SFE_LOGO_FLAME_.1]  82.3,14.48 0 top
LOGO9  OSHW-LOGOMINI  [OSHW-LOGO-MINI]  123.44,9.4 0 top
LOGO10  SFE_LOGO_NAME.1_INCH  [SFE_LOGO_NAME_.1]  109.47,8.64 0 bottom
LOGO11  SFE_LOGO_NAME.1_INCH  [SFE_LOGO_NAME_.1]  109.47,9.4 0 top
LOGO12  SFE_LOGO_FLAME.1_INCH  [SFE_LOGO_FLAME_.1]  123.44,14.48 0 top
LOGO13  OSHW-LOGOMINI  [OSHW-LOGO-MINI]  41.15,37.85 0 top
LOGO14  SFE_LOGO_NAME.1_INCH  [SFE_LOGO_NAME_.1]  27.18,37.08 0 bottom
LOGO15  SFE_LOGO_NAME.1_INCH  [SFE_LOGO_NAME_.1]  27.18,37.85 0 top
LOGO16  SFE_LOGO_FLAME.1_INCH  [SFE_LOGO_FLAME_.1]  41.15,42.93 0 top
LOGO17  OSHW-LOGOMINI  [OSHW-LOGO-MINI]  82.3,37.85 0 top
LOGO18  SFE_LOGO_NAME.1_INCH  [SFE_LOGO_NAME_.1]  68.33,37.08 0 bottom
LOGO19  SFE_LOGO_NAME.1_INCH  [SFE_LOGO_NAME_.1]  68.33,37.85 0 top
LOGO20  SFE_LOGO_FLAME.1_INCH  [SFE_LOGO_FLAME_.1]  82.3,42.93 0 top
LOGO21  OSHW-LOGOMINI  [OSHW-LOGO-MINI]  123.44,37.85 0 top
LOGO22  SFE_LOGO_NAME.1_INCH  [SFE_LOGO_NAME_.1]  109.47,37.08 0 bottom
LOGO23  SFE_LOGO_NAME.1_INCH  [SFE_LOGO_NAME_.1]  109.47,37.85 0 top
LOGO24  SFE_LOGO_FLAME.1_INCH  [SFE_LOGO_FLAME_.1]  123.44,42.93 0 top
LOGO25  OSHW-LOGOMINI  [OSHW-LOGO-MINI]  41.15,66.29 0 top
LOGO26  SFE_LOGO_NAME.1_INCH  [SFE_LOGO_NAME_.1]  27.18,65.53 0 bottom
LOGO27  SFE_LOGO_NAME.1_INCH  [SFE_LOGO_NAME_.1]  27.18,66.29 0 top
LOGO28  SFE_LOGO_FLAME.1_INCH  [SFE_LOGO_FLAME_.1]  41.15,71.37 0 top
LOGO29  OSHW-LOGOMINI  [OSHW-LOGO-MINI]  82.3,66.29 0 top
LOGO30  SFE_LOGO_NAME.1_INCH  [SFE_LOGO_NAME_.1]  68.33,65.53 0 bottom
LOGO31  SFE_LOGO_NAME.1_INCH  [SFE_LOGO_NAME_.1]  68.33,66.29 0 top
LOGO32  SFE_LOGO_FLAME.1_INCH  [SFE_LOGO_FLAME_.1]  82.3,71.37 0 top
LOGO33  OSHW-LOGOMINI  [OSHW-LOGO-MINI]  123.44,66.29 0 top
LOGO34  SFE_LOGO_NAME.1_INCH  [SFE_LOGO_NAME_.1]  109.47,65.53 0 bottom
LOGO35  SFE_LOGO_NAME.1_INCH  [SFE_LOGO_NAME_.1]  109.47,66.29 0 top
LOGO36  SFE_LOGO_FLAME.1_INCH  [SFE_LOGO_FLAME_.1]  123.44,71.37 0 top
LOGO37  OSHW-LOGOMINI  [OSHW-LOGO-MINI]  41.15,94.74 0 top
LOGO38  SFE_LOGO_NAME.1_INCH  [SFE_LOGO_NAME_.1]  27.18,93.98 0 bottom
LOGO39  SFE_LOGO_NAME.1_INCH  [SFE_LOGO_NAME_.1]  27.18,94.74 0 top
LOGO40  SFE_LOGO_FLAME.1_INCH  [SFE_LOGO_FLAME_.1]  41.15,99.82 0 top
LOGO41  OSHW-LOGOMINI  [OSHW-LOGO-MINI]  82.3,94.74 0 top
LOGO42  SFE_LOGO_NAME.1_INCH  [SFE_LOGO_NAME_.1]  68.33,93.98 0 bottom
LOGO43  SFE_LOGO_NAME.1_INCH  [SFE_LOGO_NAME_.1]  68.33,94.74 0 top
LOGO44  SFE_LOGO_FLAME.1_INCH  [SFE_LOGO_FLAME_.1]  82.3,99.82 0 top
LOGO45  OSHW-LOGOMINI  [OSHW-LOGO-MINI]  123.44,94.74 0 top
LOGO46  SFE_LOGO_NAME.1_INCH  [SFE_LOGO_NAME_.1]  109.47,93.98 0 bottom
LOGO47  SFE_LOGO_NAME.1_INCH  [SFE_LOGO_NAME_.1]  109.47,94.74 0 top
LOGO48  SFE_LOGO_FLAME.1_INCH  [SFE_LOGO_FLAME_.1]  123.44,99.82 0 top
LOGO49  OSHW-LOGOMINI  [OSHW-LOGO-MINI]  41.15,123.19 0 top
LOGO50  SFE_LOGO_NAME.1_INCH  [SFE_LOGO_NAME_.1]  27.18,122.43 0 bottom
LOGO51  SFE_LOGO_NAME.1_INCH  [SFE_LOGO_NAME_.1]  27.18,123.19 0 top
LOGO52  SFE_LOGO_FLAME.1_INCH  [SFE_LOGO_FLAME_.1]  41.15,128.27 0 top
LOGO53  OSHW-LOGOMINI  [OSHW-LOGO-MINI]  82.3,123.19 0 top
LOGO54  SFE_LOGO_NAME.1_INCH  [SFE_LOGO_NAME_.1]  68.33,122.43 0 bottom
LOGO55  SFE_LOGO_NAME.1_INCH  [SFE_LOGO_NAME_.1]  68.33,123.19 0 top
LOGO56  SFE_LOGO_FLAME.1_INCH  [SFE_LOGO_FLAME_.1]  82.3,128.27 0 top
LOGO57  OSHW-LOGOMINI  [OSHW-LOGO-MINI]  123.44,123.19 0 top
LOGO58  SFE_LOGO_NAME.1_INCH  [SFE_LOGO_NAME_.1]  109.47,122.43 0 bottom
LOGO59  SFE_LOGO_NAME.1_INCH  [SFE_LOGO_NAME_.1]  109.47,123.19 0 top
LOGO60  SFE_LOGO_FLAME.1_INCH  [SFE_LOGO_FLAME_.1]  123.44,128.27 0 top
LOGO61  OSHW-LOGOMINI  [OSHW-LOGO-MINI]  41.15,151.64 0 top
LOGO62  SFE_LOGO_NAME.1_INCH  [SFE_LOGO_NAME_.1]  27.18,150.88 0 bottom
LOGO63  SFE_LOGO_NAME.1_INCH  [SFE_LOGO_NAME_.1]  27.18,151.64 0 top
LOGO64  SFE_LOGO_FLAME.1_INCH  [SFE_LOGO_FLAME_.1]  41.15,156.72 0 top
LOGO65  OSHW-LOGOMINI  [OSHW-LOGO-MINI]  82.3,151.64 0 top
LOGO66  SFE_LOGO_NAME.1_INCH  [SFE_LOGO_NAME_.1]  68.33,150.88 0 bottom
LOGO67  SFE_LOGO_NAME.1_INCH  [SFE_LOGO_NAME_.1]  68.33,151.64 0 top
LOGO68  SFE_LOGO_FLAME.1_INCH  [SFE_LOGO_FLAME_.1]  82.3,156.72 0 top
LOGO69  OSHW-LOGOMINI  [OSHW-LOGO-MINI]  123.44,151.64 0 top
LOGO70  SFE_LOGO_NAME.1_INCH  [SFE_LOGO_NAME_.1]  109.47,150.88 0 bottom
LOGO71  SFE_LOGO_NAME.1_INCH  [SFE_LOGO_NAME_.1]  109.47,151.64 0 top
LOGO72  SFE_LOGO_FLAME.1_INCH  [SFE_LOGO_FLAME_.1]  123.44,156.72 0 top
R1  4.7k  [0402-TIGHT]  51.94,14.35 0 top
R2  39k  [0603]  45.47,23.37 0 top
R3  39k  [0603]  45.47,26.04 0 top
R4  4.7k  [0402-TIGHT]  10.79,14.35 0 top
R5  4.7k  [0402-TIGHT]  17.02,14.86 180 top
R6  4.7k  [0402-TIGHT]  58.17,14.86 180 top
R7  39k  [0603]  86.61,23.37 0 top
R8  39k  [0603]  86.61,26.04 0 top
R9  4.7k  [0402-TIGHT]  93.09,14.35 0 top
R10  4.7k  [0402-TIGHT]  99.31,14.86 180 top
R11  39k  [0603]  127.76,23.37 0 top
R12  39k  [0603]  127.76,26.04 0 top
R13  4.7k  [0402-TIGHT]  10.79,42.8 0 top
R14  4.7k  [0402-TIGHT]  17.02,43.31 180 top
R15  39k  [0603]  45.47,51.82 0 top
R16  39k  [0603]  45.47,54.48 0 top
R17  4.7k  [0402-TIGHT]  51.94,42.8 0 top
R18  4.7k  [0402-TIGHT]  58.17,43.31 180 top
R19  39k  [0603]  86.61,51.82 0 top
R20  39k  [0603]  86.61,54.48 0 top
R21  4.7k  [0402-TIGHT]  93.09,42.8 0 top
R22  4.7k  [0402-TIGHT]  99.31,43.31 180 top
R23  39k  [0603]  127.76,51.82 0 top
R24  39k  [0603]  127.76,54.48 0 top
R25  4.7k  [0402-TIGHT]  10.79,71.25 0 top
R26  4.7k  [0402-TIGHT]  17.02,71.76 180 top
R27  39k  [0603]  45.47,80.26 0 top
R28  39k  [0603]  45.47,82.93 0 top
R29  4.7k  [0402-TIGHT]  51.94,71.25 0 top
R30  4.7k  [0402-TIGHT]  58.17,71.76 180 top
R31  39k  [0603]  86.61,80.26 0 top
R32  39k  [0603]  86.61,82.93 0 top
R33  4.7k  [0402-TIGHT]  93.09,71.25 0 top
R34  4.7k  [0402-TIGHT]  99.31,71.76 180 top
R35  39k  [0603]  127.76,80.26 0 top
R36  39k  [0603]  127.76,82.93 0 top
R37  4.7k  [0402-TIGHT]  10.79,99.7 0 top
R38  4.7k  [0402-TIGHT]  17.02,100.2 180 top
R39  39k  [0603]  45.47,108.71 0 top
R40  39k  [0603]  45.47,111.38 0 top
R41  4.7k  [0402-TIGHT]  51.94,99.7 0 top
R42  4.7k  [0402-TIGHT]  58.17,100.2 180 top
R43  39k  [0603]  86.61,108.71 0 top
R44  39k  [0603]  86.61,111.38 0 top
R45  4.7k  [0402-TIGHT]  93.09,99.7 0 top
R46  4.7k  [0402-TIGHT]  99.31,100.2 180 top
R47  39k  [0603]  127.76,108.71 0 top
R48  39k  [0603]  127.76,111.38 0 top
R49  4.7k  [0402-TIGHT]  10.79,128.14 0 top
R50  4.7k  [0402-TIGHT]  17.02,128.65 180 top
R51  39k  [0603]  45.47,137.16 0 top
R52  39k  [0603]  45.47,139.83 0 top
R53  4.7k  [0402-TIGHT]  51.94,128.14 0 top
R54  4.7k  [0402-TIGHT]  58.17,128.65 180 top
R55  39k  [0603]  86.61,137.16 0 top
R56  39k  [0603]  86.61,139.83 0 top
R57  4.7k  [0402-TIGHT]  93.09,128.14 0 top
R58  4.7k  [0402-TIGHT]  99.31,128.65 180 top
R59  39k  [0603]  127.76,137.16 0 top
R60  39k  [0603]  127.76,139.83 0 top
R61  4.7k  [0402-TIGHT]  10.79,156.59 0 top
R62  4.7k  [0402-TIGHT]  17.02,157.1 180 top
R63  39k  [0603]  45.47,165.61 0 top
R64  39k  [0603]  45.47,168.28 0 top
R65  4.7k  [0402-TIGHT]  51.94,156.59 0 top
R66  4.7k  [0402-TIGHT]  58.17,157.1 180 top
R67  39k  [0603]  86.61,165.61 0 top
R68  39k  [0603]  86.61,168.28 0 top
R69  4.7k  [0402-TIGHT]  93.09,156.59 0 top
R70  4.7k  [0402-TIGHT]  99.31,157.1 180 top
R71  39k  [0603]  127.76,165.61 0 top
R72  39k  [0603]  127.76,168.28 0 top
U1  Alphanumeric Display  [SILSMART_DISPLAY]  27.18,20.83 0 bottom
U2  XC9140  [SOT23-5]  12.57,16.89 90 top
U3  Alphanumeric Display  [SILSMART_DISPLAY]  68.33,20.83 0 bottom
U4  XC9140  [SOT23-5]  53.72,16.89 90 top
U5  Alphanumeric Display  [SILSMART_DISPLAY]  109.47,20.83 0 bottom
U6  XC9140  [SOT23-5]  94.87,16.89 90 top
U7  Alphanumeric Display  [SILSMART_DISPLAY]  27.18,49.28 0 bottom
U8  XC9140  [SOT23-5]  12.57,45.34 90 top
U9  Alphanumeric Display  [SILSMART_DISPLAY]  68.33,49.28 0 bottom
U10  XC9140  [SOT23-5]  53.72,45.34 90 top
U11  Alphanumeric Display  [SILSMART_DISPLAY]  109.47,49.28 0 bottom
U12  XC9140  [SOT23-5]  94.87,45.34 90 top
U13  Alphanumeric Display  [SILSMART_DISPLAY]  27.18,77.72 0 bottom
U14  XC9140  [SOT23-5]  12.57,73.79 90 top
U15  Alphanumeric Display  [SILSMART_DISPLAY]  68.33,77.72 0 bottom
U16  XC9140  [SOT23-5]  53.72,73.79 90 top
U17  Alphanumeric Display  [SILSMART_DISPLAY]  109.47,77.72 0 bottom
U18  XC9140  [SOT23-5]  94.87,73.79 90 top
U19  Alphanumeric Display  [SILSMART_DISPLAY]  27.18,106.17 0 bottom
U20  XC9140  [SOT23-5]  12.57,102.23 90 top
U21  Alphanumeric Display  [SILSMART_DISPLAY]  68.33,106.17 0 bottom
U22  XC9140  [SOT23-5]  53.72,102.23 90 top
U23  Alphanumeric Display  [SILSMART_DISPLAY]  109.47,106.17 0 bottom
U24  XC9140  [SOT23-5]  94.87,102.23 90 top
U25  Alphanumeric Display  [SILSMART_DISPLAY]  27.18,134.62 0 bottom
U26  XC9140  [SOT23-5]  12.57,130.68 90 top
U27  Alphanumeric Display  [SILSMART_DISPLAY]  68.33,134.62 0 bottom
U28  XC9140  [SOT23-5]  53.72,130.68 90 top
U29  Alphanumeric Display  [SILSMART_DISPLAY]  109.47,134.62 0 bottom
U30  XC9140  [SOT23-5]  94.87,130.68 90 top
U31  Alphanumeric Display  [SILSMART_DISPLAY]  27.18,163.07 0 bottom
U32  XC9140  [SOT23-5]  12.57,159.13 90 top
U33  Alphanumeric Display  [SILSMART_DISPLAY]  68.33,163.07 0 bottom
U34  XC9140  [SOT23-5]  53.72,159.13 90 top
U35  Alphanumeric Display  [SILSMART_DISPLAY]  109.47,163.07 0 bottom
U36  XC9140  [SOT23-5]  94.87,159.13 90 top
U$1  [DEFAULT_ADR#_0X700]  34.67,11.05 0 bottom
U$2  [QWIIC_4MM]  54.36,30.35 0 top
U$3  MOUNTING_HOLE_M2-0.4X6  [MOUNTING_HOLE_M2-0.4X6]  39.88,22.1 0 top
U$4  MOUNTING_HOLE_M2-0.4X6  [MOUNTING_HOLE_M2-0.4X6]  81.03,22.1 0 top
U$5  MOUNTING_HOLE_M2-0.4X6  [MOUNTING_HOLE_M2-0.4X6]  55.63,22.1 0 top
U$6  [QWIIC_4MM]  13.21,30.35 0 top
U$7  MOUNTING_HOLE_M2-0.4X6  [MOUNTING_HOLE_M2-0.4X6]  14.48,22.1 0 top
U$8  [QWIIC_ALPHANUMERIC0]  13.46,33.15 0 top
U$9  [QWIIC_ALPHANUMERIC0]  41.15,33.15 0 bottom
U$10  [DISPLAY0]  21.34,30.99 0 top
U$11  [DISPLAY0]  33.02,30.99 0 bottom
U$12  [#A0#0]  43.43,27.3 0 top
U$13  [#A1#0]  43.43,24.77 0 top
U$14  [C0]  36.58,25.53 0 top
U$15  [D0]  36.58,24 0 top
U$16  [30]  36.58,19.56 0 top
U$17  [G0]  36.58,17.02 0 top
U$18  [QWIIC_ALPHANUMERIC0]  54.61,33.15 0 top
U$19  [QWIIC_ALPHANUMERIC0]  82.3,33.15 0 bottom
U$20  [DISPLAY0]  62.48,30.99 0 top
U$21  [DISPLAY0]  74.17,30.99 0 bottom
U$22  [#A0#0]  84.58,27.3 0 top
U$23  [#A1#0]  84.58,24.77 0 top
U$24  [C0]  77.72,25.53 0 top
U$25  [D0]  77.72,24 0 top
U$26  [30]  77.72,19.56 0 top
U$27  [G0]  77.72,17.02 0 top
U$28  [DEFAULT_ADR#_0X700]  75.82,11.05 0 bottom
U$29  [QWIIC_4MM]  95.5,30.35 0 top
U$30  MOUNTING_HOLE_M2-0.4X6  [MOUNTING_HOLE_M2-0.4X6]  122.17,22.1 0 top
U$31  MOUNTING_HOLE_M2-0.4X6  [MOUNTING_HOLE_M2-0.4X6]  96.77,22.1 0 top
U$32  [QWIIC_ALPHANUMERIC0]  95.76,33.15 0 top
U$33  [QWIIC_ALPHANUMERIC0]  123.44,33.15 0 bottom
U$34  [DISPLAY0]  103.63,30.99 0 top
U$35  [DISPLAY0]  115.32,30.99 0 bottom
U$36  [#A0#0]  125.73,27.3 0 top
U$37  [#A1#0]  125.73,24.77 0 top
U$38  [C0]  118.87,25.53 0 top
U$39  [D0]  118.87,24 0 top
U$40  [30]  118.87,19.56 0 top
U$41  [G0]  118.87,17.02 0 top
U$42  [DEFAULT_ADR#_0X700]  116.97,11.05 0 bottom
U$43  [QWIIC_4MM]  13.21,58.8 0 top
U$44  MOUNTING_HOLE_M2-0.4X6  [MOUNTING_HOLE_M2-0.4X6]  39.88,50.55 0 top
U$45  MOUNTING_HOLE_M2-0.4X6  [MOUNTING_HOLE_M2-0.4X6]  14.48,50.55 0 top
U$46  [QWIIC_ALPHANUMERIC0]  13.46,61.59 0 top
U$47  [QWIIC_ALPHANUMERIC0]  41.15,61.59 0 bottom
U$48  [DISPLAY0]  21.34,59.44 0 top
U$49  [DISPLAY0]  33.02,59.44 0 bottom
U$50  [#A0#0]  43.43,55.75 0 top
U$51  [#A1#0]  43.43,53.21 0 top
U$52  [C0]  36.58,53.97 0 top
U$53  [D0]  36.58,52.45 0 top
U$54  [30]  36.58,48.01 0 top
U$55  [G0]  36.58,45.47 0 top
U$56  [DEFAULT_ADR#_0X700]  34.67,39.5 0 bottom
U$57  [QWIIC_4MM]  54.36,58.8 0 top
U$58  MOUNTING_HOLE_M2-0.4X6  [MOUNTING_HOLE_M2-0.4X6]  81.03,50.55 0 top
U$59  MOUNTING_HOLE_M2-0.4X6  [MOUNTING_HOLE_M2-0.4X6]  55.63,50.55 0 top
U$60  [QWIIC_ALPHANUMERIC0]  54.61,61.59 0 top
U$61  [QWIIC_ALPHANUMERIC0]  82.3,61.59 0 bottom
U$62  [DISPLAY0]  62.48,59.44 0 top
U$63  [DISPLAY0]  74.17,59.44 0 bottom
U$64  [#A0#0]  84.58,55.75 0 top
U$65  [#A1#0]  84.58,53.21 0 top
U$66  [C0]  77.72,53.97 0 top
U$67  [D0]  77.72,52.45 0 top
U$68  [30]  77.72,48.01 0 top
U$69  [G0]  77.72,45.47 0 top
U$70  [DEFAULT_ADR#_0X700]  75.82,39.5 0 bottom
U$71  [QWIIC_4MM]  95.5,58.8 0 top
U$72  MOUNTING_HOLE_M2-0.4X6  [MOUNTING_HOLE_M2-0.4X6]  122.17,50.55 0 top
U$73  MOUNTING_HOLE_M2-0.4X6  [MOUNTING_HOLE_M2-0.4X6]  96.77,50.55 0 top
U$74  [QWIIC_ALPHANUMERIC0]  95.76,61.59 0 top
U$75  [QWIIC_ALPHANUMERIC0]  123.44,61.59 0 bottom
U$76  [DISPLAY0]  103.63,59.44 0 top
U$77  [DISPLAY0]  115.32,59.44 0 bottom
U$78  [#A0#0]  125.73,55.75 0 top
U$79  [#A1#0]  125.73,53.21 0 top
U$80  [C0]  118.87,53.97 0 top
U$81  [D0]  118.87,52.45 0 top
U$82  [30]  118.87,48.01 0 top
U$83  [G0]  118.87,45.47 0 top
U$84  [DEFAULT_ADR#_0X700]  116.97,39.5 0 bottom
U$85  [QWIIC_4MM]  13.21,87.25 0 top
U$86  MOUNTING_HOLE_M2-0.4X6  [MOUNTING_HOLE_M2-0.4X6]  39.88,78.99 0 top
U$87  MOUNTING_HOLE_M2-0.4X6  [MOUNTING_HOLE_M2-0.4X6]  14.48,78.99 0 top
U$88  [QWIIC_ALPHANUMERIC0]  13.46,90.04 0 top
U$89  [QWIIC_ALPHANUMERIC0]  41.15,90.04 0 bottom
U$90  [DISPLAY0]  21.34,87.88 0 top
U$91  [DISPLAY0]  33.02,87.88 0 bottom
U$92  [#A0#0]  43.43,84.2 0 top
U$93  [#A1#0]  43.43,81.66 0 top
U$94  [C0]  36.58,82.42 0 top
U$95  [D0]  36.58,80.9 0 top
U$96  [30]  36.58,76.45 0 top
U$97  [G0]  36.58,73.91 0 top
U$98  [DEFAULT_ADR#_0X700]  34.67,67.95 0 bottom
U$99  [QWIIC_4MM]  54.36,87.25 0 top
U$100  MOUNTING_HOLE_M2-0.4X6  [MOUNTING_HOLE_M2-0.4X6]  81.03,78.99 0 top
U$101  MOUNTING_HOLE_M2-0.4X6  [MOUNTING_HOLE_M2-0.4X6]  55.63,78.99 0 top
U$102  [QWIIC_ALPHANUMERIC0]  54.61,90.04 0 top
U$103  [QWIIC_ALPHANUMERIC0]  82.3,90.04 0 bottom
U$104  [DISPLAY0]  62.48,87.88 0 top
U$105  [DISPLAY0]  74.17,87.88 0 bottom
U$106  [#A0#0]  84.58,84.2 0 top
U$107  [#A1#0]  84.58,81.66 0 top
U$108  [C0]  77.72,82.42 0 top
U$109  [D0]  77.72,80.9 0 top
U$110  [30]  77.72,76.45 0 top
U$111  [G0]  77.72,73.91 0 top
U$112  [DEFAULT_ADR#_0X700]  75.82,67.95 0 bottom
U$113  [QWIIC_4MM]  95.5,87.25 0 top
U$114  MOUNTING_HOLE_M2-0.4X6  [MOUNTING_HOLE_M2-0.4X6]  122.17,78.99 0 top
U$115  MOUNTING_HOLE_M2-0.4X6  [MOUNTING_HOLE_M2-0.4X6]  96.77,78.99 0 top
U$116  [QWIIC_ALPHANUMERIC0]  95.76,90.04 0 top
U$117  [QWIIC_ALPHANUMERIC0]  123.44,90.04 0 bottom
U$118  [DISPLAY0]  103.63,87.88 0 top
U$119  [DISPLAY0]  115.32,87.88 0 bottom
U$120  [#A0#0]  125.73,84.2 0 top
U$121  [#A1#0]  125.73,81.66 0 top
U$122  [C0]  118.87,82.42 0 top
U$123  [D0]  118.87,80.9 0 top
U$124  [30]  118.87,76.45 0 top
U$125  [G0]  118.87,73.91 0 top
U$126  [DEFAULT_ADR#_0X700]  116.97,67.95 0 bottom
U$127  [QWIIC_4MM]  13.21,115.7 0 top
U$128  MOUNTING_HOLE_M2-0.4X6  [MOUNTING_HOLE_M2-0.4X6]  39.88,107.44 0 top
U$129  MOUNTING_HOLE_M2-0.4X6  [MOUNTING_HOLE_M2-0.4X6]  14.48,107.44 0 top
U$130  [QWIIC_ALPHANUMERIC0]  13.46,118.49 0 top
U$131  [QWIIC_ALPHANUMERIC0]  41.15,118.49 0 bottom
U$132  [DISPLAY0]  21.34,116.33 0 top
U$133  [DISPLAY0]  33.02,116.33 0 bottom
U$134  [#A0#0]  43.43,112.65 0 top
U$135  [#A1#0]  43.43,110.11 0 top
U$136  [C0]  36.58,110.87 0 top
U$137  [D0]  36.58,109.35 0 top
U$138  [30]  36.58,104.9 0 top
U$139  [G0]  36.58,102.36 0 top
U$140  [DEFAULT_ADR#_0X700]  34.67,96.39 0 bottom
U$141  [QWIIC_4MM]  54.36,115.7 0 top
U$142  MOUNTING_HOLE_M2-0.4X6  [MOUNTING_HOLE_M2-0.4X6]  81.03,107.44 0 top
U$143  MOUNTING_HOLE_M2-0.4X6  [MOUNTING_HOLE_M2-0.4X6]  55.63,107.44 0 top
U$144  [QWIIC_ALPHANUMERIC0]  54.61,118.49 0 top
U$145  [QWIIC_ALPHANUMERIC0]  82.3,118.49 0 bottom
U$146  [DISPLAY0]  62.48,116.33 0 top
U$147  [DISPLAY0]  74.17,116.33 0 bottom
U$148  [#A0#0]  84.58,112.65 0 top
U$149  [#A1#0]  84.58,110.11 0 top
U$150  [C0]  77.72,110.87 0 top
U$151  [D0]  77.72,109.35 0 top
U$152  [30]  77.72,104.9 0 top
U$153  [G0]  77.72,102.36 0 top
U$154  [DEFAULT_ADR#_0X700]  75.82,96.39 0 bottom
U$155  [QWIIC_4MM]  95.5,115.7 0 top
U$156  MOUNTING_HOLE_M2-0.4X6  [MOUNTING_HOLE_M2-0.4X6]  122.17,107.44 0 top
U$157  MOUNTING_HOLE_M2-0.4X6  [MOUNTING_HOLE_M2-0.4X6]  96.77,107.44 0 top
U$158  [QWIIC_ALPHANUMERIC0]  95.76,118.49 0 top
U$159  [QWIIC_ALPHANUMERIC0]  123.44,118.49 0 bottom
U$160  [DISPLAY0]  103.63,116.33 0 top
U$161  [DISPLAY0]  115.32,116.33 0 bottom
U$162  [#A0#0]  125.73,112.65 0 top
U$163  [#A1#0]  125.73,110.11 0 top
U$164  [C0]  118.87,110.87 0 top
U$165  [D0]  118.87,109.35 0 top
U$166  [30]  118.87,104.9 0 top
U$167  [G0]  118.87,102.36 0 top
U$168  [DEFAULT_ADR#_0X700]  116.97,96.39 0 bottom
U$169  [QWIIC_4MM]  13.21,144.15 0 top
U$170  MOUNTING_HOLE_M2-0.4X6  [MOUNTING_HOLE_M2-0.4X6]  39.88,135.89 0 top
U$171  MOUNTING_HOLE_M2-0.4X6  [MOUNTING_HOLE_M2-0.4X6]  14.48,135.89 0 top
U$172  [QWIIC_ALPHANUMERIC0]  13.46,146.94 0 top
U$173  [QWIIC_ALPHANUMERIC0]  41.15,146.94 0 bottom
U$174  [DISPLAY0]  21.34,144.78 0 top
U$175  [DISPLAY0]  33.02,144.78 0 bottom
U$176  [#A0#0]  43.43,141.1 0 top
U$177  [#A1#0]  43.43,138.56 0 top
U$178  [C0]  36.58,139.32 0 top
U$179  [D0]  36.58,137.8 0 top
U$180  [30]  36.58,133.35 0 top
U$181  [G0]  36.58,130.81 0 top
U$182  [DEFAULT_ADR#_0X700]  34.67,124.84 0 bottom
U$183  [QWIIC_4MM]  54.36,144.15 0 top
U$184  MOUNTING_HOLE_M2-0.4X6  [MOUNTING_HOLE_M2-0.4X6]  81.03,135.89 0 top
U$185  MOUNTING_HOLE_M2-0.4X6  [MOUNTING_HOLE_M2-0.4X6]  55.63,135.89 0 top
U$186  [QWIIC_ALPHANUMERIC0]  54.61,146.94 0 top
U$187  [QWIIC_ALPHANUMERIC0]  82.3,146.94 0 bottom
U$188  [DISPLAY0]  62.48,144.78 0 top
U$189  [DISPLAY0]  74.17,144.78 0 bottom
U$190  [#A0#0]  84.58,141.1 0 top
U$191  [#A1#0]  84.58,138.56 0 top
U$192  [C0]  77.72,139.32 0 top
U$193  [D0]  77.72,137.8 0 top
U$194  [30]  77.72,133.35 0 top
U$195  [G0]  77.72,130.81 0 top
U$196  [DEFAULT_ADR#_0X700]  75.82,124.84 0 bottom
U$197  [QWIIC_4MM]  95.5,144.15 0 top
U$198  MOUNTING_HOLE_M2-0.4X6  [MOUNTING_HOLE_M2-0.4X6]  122.17,135.89 0 top
U$199  MOUNTING_HOLE_M2-0.4X6  [MOUNTING_HOLE_M2-0.4X6]  96.77,135.89 0 top
U$200  [QWIIC_ALPHANUMERIC0]  95.76,146.94 0 top
U$201  [QWIIC_ALPHANUMERIC0]  123.44,146.94 0 bottom
U$202  [DISPLAY0]  103.63,144.78 0 top
U$203  [DISPLAY0]  115.32,144.78 0 bottom
U$204  [#A0#0]  125.73,141.1 0 top
U$205  [#A1#0]  125.73,138.56 0 top
U$206  [C0]  118.87,139.32 0 top
U$207  [D0]  118.87,137.8 0 top
U$208  [30]  118.87,133.35 0 top
U$209  [G0]  118.87,130.81 0 top
U$210  [DEFAULT_ADR#_0X700]  116.97,124.84 0 bottom
U$211  [QWIIC_4MM]  13.21,172.59 0 top
U$212  MOUNTING_HOLE_M2-0.4X6  [MOUNTING_HOLE_M2-0.4X6]  39.88,164.34 0 top
U$213  MOUNTING_HOLE_M2-0.4X6  [MOUNTING_HOLE_M2-0.4X6]  14.48,164.34 0 top
U$214  [QWIIC_ALPHANUMERIC0]  13.46,175.39 0 top
U$215  [QWIIC_ALPHANUMERIC0]  41.15,175.39 0 bottom
U$216  [DISPLAY0]  21.34,173.23 0 top
U$217  [DISPLAY0]  33.02,173.23 0 bottom
U$218  [#A0#0]  43.43,169.55 0 top
U$219  [#A1#0]  43.43,167 0 top
U$220  [C0]  36.58,167.77 0 top
U$221  [D0]  36.58,166.24 0 top
U$222  [30]  36.58,161.8 0 top
U$223  [G0]  36.58,159.26 0 top
U$224  [DEFAULT_ADR#_0X700]  34.67,153.29 0 bottom
U$225  [QWIIC_4MM]  54.36,172.59 0 top
U$226  MOUNTING_HOLE_M2-0.4X6  [MOUNTING_HOLE_M2-0.4X6]  81.03,164.34 0 top
U$227  MOUNTING_HOLE_M2-0.4X6  [MOUNTING_HOLE_M2-0.4X6]  55.63,164.34 0 top
U$228  [QWIIC_ALPHANUMERIC0]  54.61,175.39 0 top
U$229  [QWIIC_ALPHANUMERIC0]  82.3,175.39 0 bottom
U$230  [DISPLAY0]  62.48,173.23 0 top
U$231  [DISPLAY0]  74.17,173.23 0 bottom
U$232  [#A0#0]  84.58,169.55 0 top
U$233  [#A1#0]  84.58,167 0 top
U$234  [C0]  77.72,167.77 0 top
U$235  [D0]  77.72,166.24 0 top
U$236  [30]  77.72,161.8 0 top
U$237  [G0]  77.72,159.26 0 top
U$238  [DEFAULT_ADR#_0X700]  75.82,153.29 0 bottom
U$239  [QWIIC_4MM]  95.5,172.59 0 top
U$240  MOUNTING_HOLE_M2-0.4X6  [MOUNTING_HOLE_M2-0.4X6]  122.17,164.34 0 top
U$241  MOUNTING_HOLE_M2-0.4X6  [MOUNTING_HOLE_M2-0.4X6]  96.77,164.34 0 top
U$242  [QWIIC_ALPHANUMERIC0]  95.76,175.39 0 top
U$243  [QWIIC_ALPHANUMERIC0]  123.44,175.39 0 bottom
U$244  [DISPLAY0]  103.63,173.23 0 top
U$245  [DISPLAY0]  115.32,173.23 0 bottom
U$246  [#A0#0]  125.73,169.55 0 top
U$247  [#A1#0]  125.73,167 0 top
U$248  [C0]  118.87,167.77 0 top
U$249  [D0]  118.87,166.24 0 top
U$250  [30]  118.87,161.8 0 top
U$251  [G0]  118.87,159.26 0 top
U$252  [DEFAULT_ADR#_0X700]  116.97,153.29 0 bottom

## Library data of the parts
A0 A1-A35 I2C I2C1-I2C17 = SparkFun-Jumpers
C1 C5 C9 C13 C17 C21 C25 C29 C33 C37 C41 C45 C49 C53 C57 C61 C65 C69 = SparkFun-Capacitors; PROD_ID: CAP-08604
C2 C4 C6 C8 C10 C12 C14 C16 C18 C20 C22 C24 C26 C28 C30 C32 C34 C36 C38 C40 C42 C44 C46 C48 C50 C52 C54 C56 C58 C60 C62 C64 C66 C68 C70 C72 = SparkFun-Capacitors; PROD_ID: CAP-11015
C3 C7 C11 C15 C19 C23 C27 C31 C35 C39 C43 C47 C51 C55 C59 C63 C67 C71 = SparkFun-Capacitors; PROD_ID: CAP-08280
D1-D18 = SparkFun-DiscreteSemi; PROD_ID: DIO-09646
E$1-E$4 FD1-FD72 LOGO1-LOGO72 U$2 U$6 U$29 U$43 U$57 U$71 U$85 U$99 U$113 U$127 U$141 U$155 U$169 U$183 U$197 U$211 U$225 U$239 = SparkFun-Aesthetics
E$5 E$6 = SparkFun-Retired
H1-H72 = SparkFun-Hardware
IC1-IC18 = Alphanumeric_Display_Library; PROD_ID: IC-16176
J1 J3 J7 J10 J13 J16 J19 J22 J25 J28 J31 J34 J37 J40 J43 J46 J49 J52 = SparkFun-Connectors
J2 J4-J6 J8 J9 J11 J12 J14 J15 J17 J18 J20 J21 J23 J24 J26 J27 J29 J30 J32 J33 J35 J36 J38 J39 J41 J42 J44 J45 J47 J48 J50 J51 J53 J54 = SparkFun-Connectors; PROD_ID: CONN-14483
L1-L18 = SparkFun-Coils; PROD_ID: NDUC-10146
R1 R4-R6 R9 R10 R13 R14 R17 R18 R21 R22 R25 R26 R29 R30 R33 R34 R37 R38 R41 R42 R45 R46 R49 R50 R53 R54 R57 R58 R61 R62 R65 R66 R69 R70 = SparkFun-Resistors; PROD_ID: RES-15343
R2 R3 R7 R8 R11 R12 R15 R16 R19 R20 R23 R24 R27 R28 R31 R32 R35 R36 R39 R40 R43 R44 R47 R48 R51 R52 R55 R56 R59 R60 R63 R64 R67 R68 R71 R72 = SparkFun-Resistors; PROD_ID: RES-12377
U1 U3 U5 U7 U9 U11 U13 U15 U17 U19 U21 U23 U25 U27 U29 U31 U33 U35 = SparkFun-Displays; PROD_ID: COMP-14892
U2 U4 U6 U8 U10 U12 U14 U16 U18 U20 U22 U24 U26 U28 U30 U32 U34 U36 = SparkFun-IC-Power; PROD_ID: VREG-14648
U$1 U$8-U$28 U$32-U$42 U$46-U$56 U$60-U$70 U$74-U$84 U$88-U$98 U$102-U$112 U$116-U$126 U$130-U$140 U$144-U$154 U$158-U$168 U$172-U$182 U$186-U$196 U$200-U$210 U$214-U$224 U$228-U$238 U$242-U$252 = output
U$3-U$5 U$7 U$30 U$31 U$44 U$45 U$58 U$59 U$72 U$73 U$86 U$87 U$100 U$101 U$114 U$115 U$128 U$129 U$142 U$143 U$156 U$157 U$170 U$171 U$184 U$185 U$198 U$199 U$212 U$213 U$226 U$227 U$240 U$241 = Alphanumeric_Display_Library